# Altium PCB msp430.PcbDoc
Units mil, origin at the board's own origin, x right, y up, seen from the top; angles counter-clockwise.
Board outline 1082.68 x 1574.8 mil, 2 copper layers (Top Layer, Bottom Layer); 31 components, 24 nets, 154 pads, 79 vias.
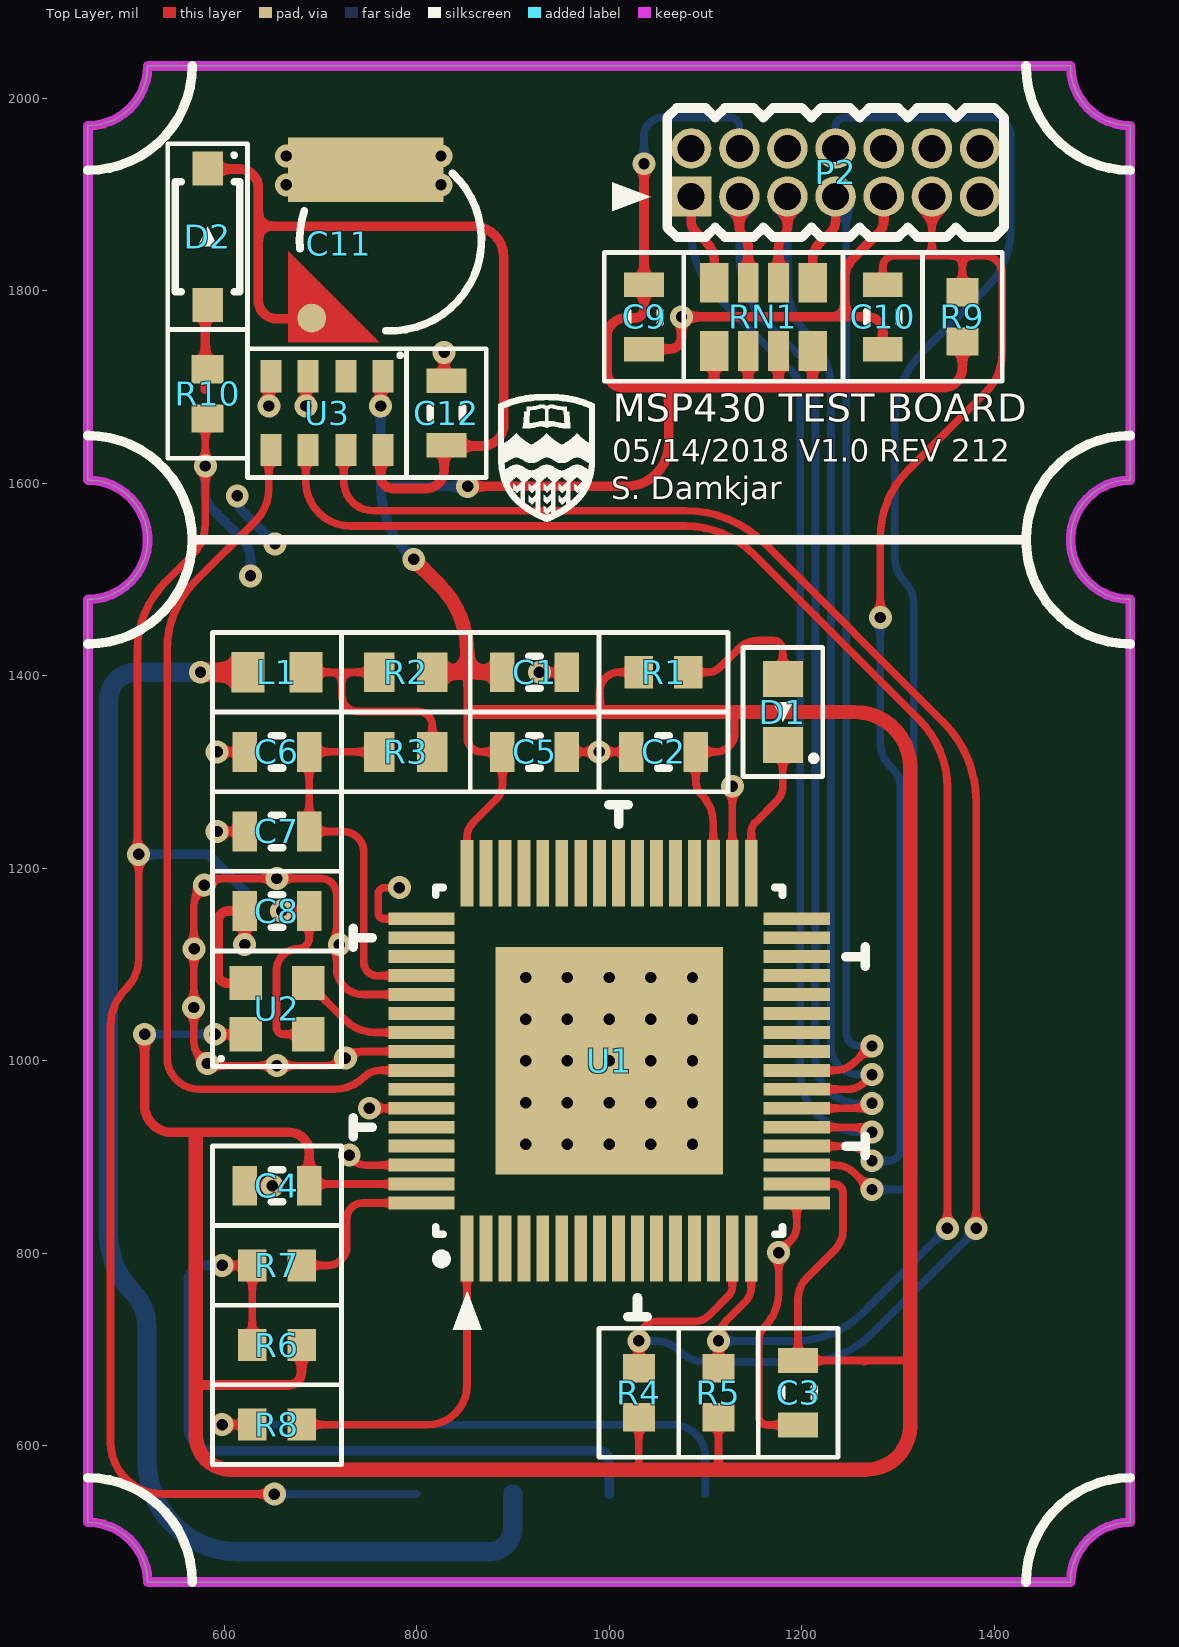
[diagram p0: Top Layer view]
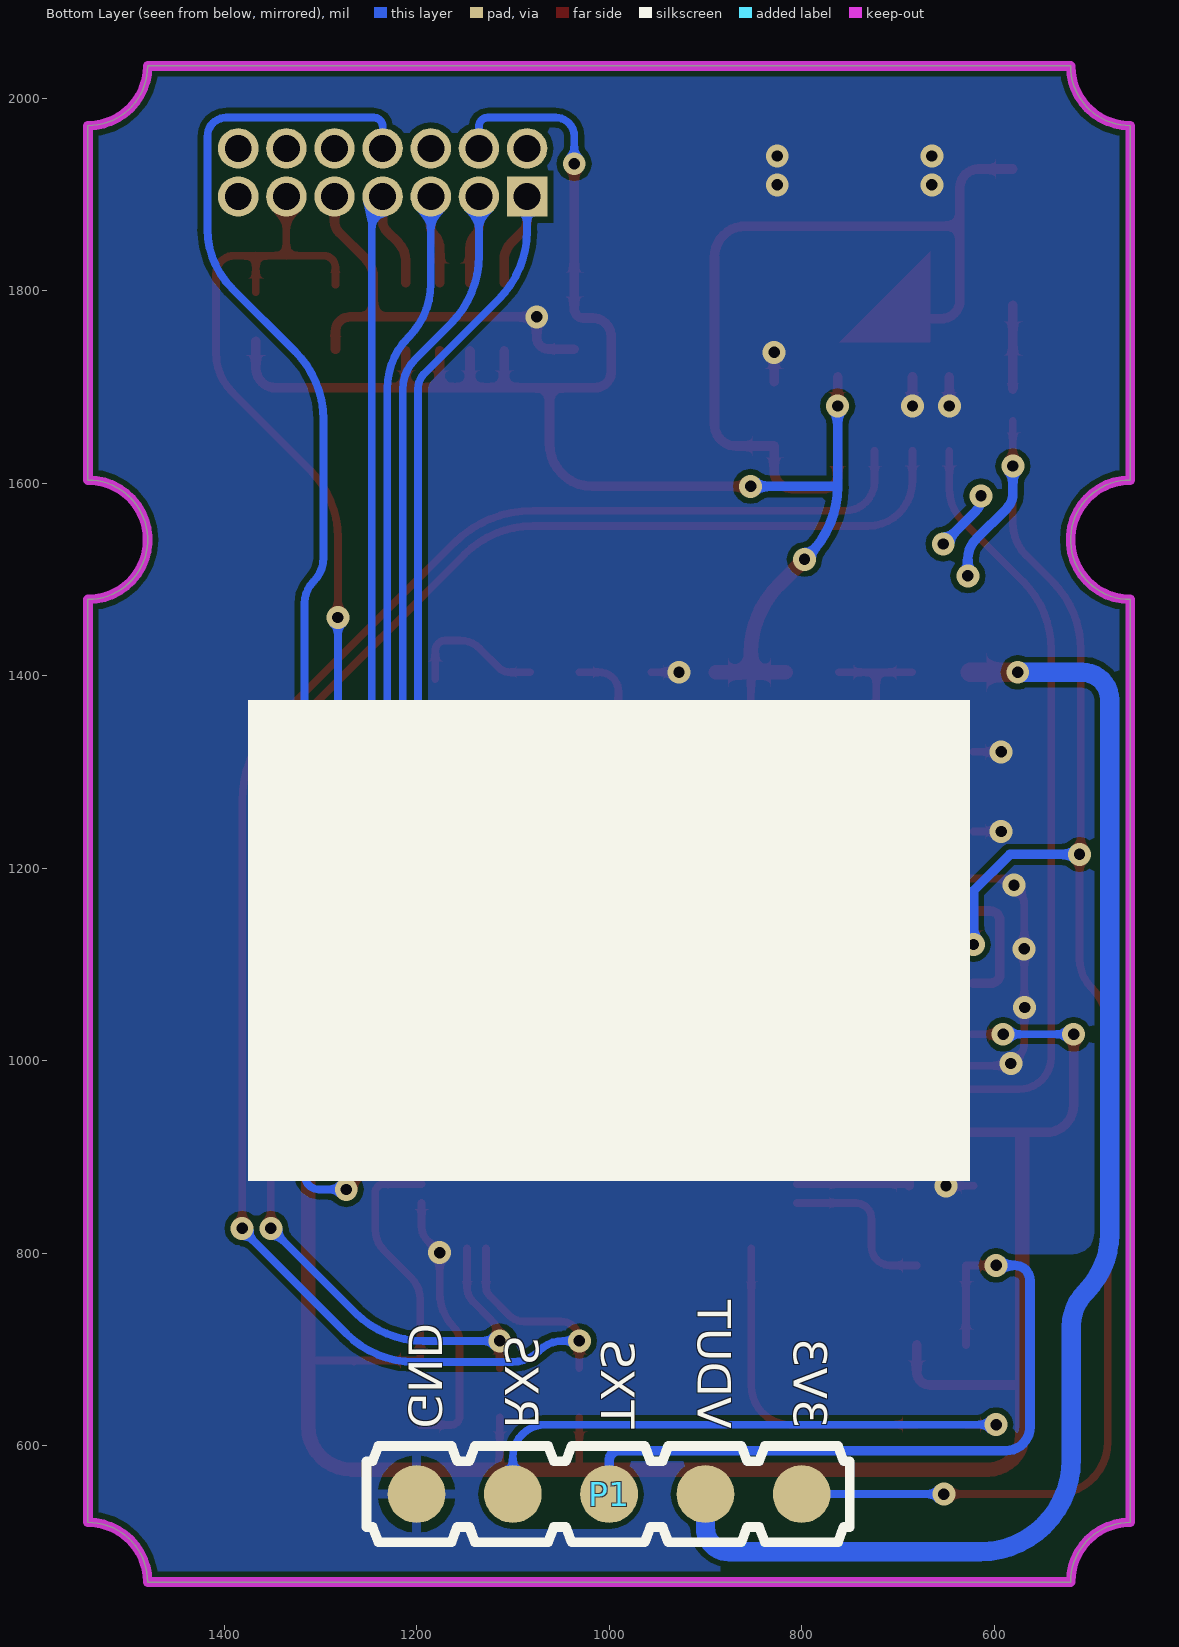
[diagram p1: Bottom Layer view, seen from below]

## Layer stack, top to bottom
Top Solder: solder mask 0.4, Solder Resist, Dk 3.5
Top Layer: signal copper 1.4
Dielectric 1: dielectric 12.6, FR-4, Dk 4.8
Bottom Layer: signal copper 1.4
Bottom Solder: solder mask 0.4, Solder Resist, Dk 3.5

## Board outline
458.66,520.67 458.66,1479.33 ccw(c458.66,1541.34) 458.66,1603.35 458.66,1971.46 ccw(c458.66,2033.46) 520.67,2033.46 1479.33,2033.46 ccw(c1541.34,2033.46) 1541.34,1971.46 1541.34,1603.35 ccw(c1541.34,1541.34) 1541.34,1479.33 1541.34,520.67 ccw(c1541.34,458.66) 1479.33,458.66 520.67,458.66 ccw(c458.66,458.66)

## Design rules (kind name [scope] priority, off if disabled: settings)
AcuteAngle [All] p1: minimum=6.00000000000000E+0001 checktracksonly=FALSE
BoardOutlineClearance [All] p1: gap=7.87 ignorepadtopadclearanceinfootprint=FALSE
Clearance [All] p1: gap=6 ignorepadtopadclearanceinfootprint=FALSE except(0: Arc-Hole Track-Hole SMDPad-Hole THPad-Hole Via-Hole Fill-Hole Poly-Hole Region-Hole Text-Hole)
Clearance ClearanceTop [OnLayer('Component Side')] p2 off: gap=4 ignorepadtopadclearanceinfootprint=FALSE except(0: Arc-Hole Track-Hole SMDPad-Hole THPad-Hole Via-Hole Fill-Hole Poly-Hole Region-Hole Text-Hole)
Clearance ClearanceTop_1 [OnLayer('Signal Layer 1')] p3 off: gap=4 ignorepadtopadclearanceinfootprint=FALSE except(0: Arc-Hole Track-Hole SMDPad-Hole THPad-Hole Via-Hole Fill-Hole Poly-Hole Region-Hole Text-Hole)
Clearance ClearanceTop_2 [OnLayer('Signal Layer 2')] p4 off: gap=4 ignorepadtopadclearanceinfootprint=FALSE except(0: Arc-Hole Track-Hole SMDPad-Hole THPad-Hole Via-Hole Fill-Hole Poly-Hole Region-Hole Text-Hole)
Clearance ClearanceBottom [OnLayer('Solder Side')] p5 off: gap=4 ignorepadtopadclearanceinfootprint=FALSE except(0: Arc-Hole Track-Hole SMDPad-Hole THPad-Hole Via-Hole Fill-Hole Poly-Hole Region-Hole Text-Hole)
Height HeightTop [OnLayer('Component Side')] p1: minheight=0 maxheight=1000 prefheight=157.48
Height HeightBottom [OnLayer('Solder Side')] p2: minheight=0 maxheight=157.48 prefheight=157.48
HoleSize [All] p1: absolutevalues=TRUE maxlimit=255.91 minlimit=7.87 maxpercent=80.000 minpercent=20.000
MinimumAnnularRing [All] p1: minimumring=4
MinimumSolderMaskSliver [All] p1: minsoldermaskwidth=3.94
PolygonConnect PolygonConnect_1 [IsVia] p1: connectstyle=Direct reliefconductorwidth=10 reliefentries=4 polygonreliefangle="90 Angle" airgapwidth=10
PolygonConnect [All] p2: connectstyle=Relief reliefconductorwidth=10 reliefentries=4 polygonreliefangle="90 Angle" airgapwidth=10
RoutingVias [All] p1: holewidth=8 width=20 viastyle="Through Hole" minholewidth=11.81 minwidth=23.81 maxholewidth=28 maxwidth=50
SMDEntry [All] p1: side=TRUE corner=FALSE anyangle=FALSE
SMDNeckDown [All] p1: percent=90.000
SMDToCorner [All] p1: distance=0
SMDToPlane [All] p1: distance=0
SilkToSilkClearance [All] p1: silktosilkclearance=6
SilkToSolderMaskClearance [IsPad] p1: minsilkscreentomaskgap=5.12 clearancetoexposedcopper=TRUE
SolderMaskExpansion [All] p1: expansion=0
UnConnectedPin [All] p1:
Width [All] p1: maxlimit=100 minlimit=6 preferedwidth=10 checkconnectedcopper=TRUE
25 further rules are at their usual default settings.

## Components (designator, comment, footprint, x,y, rotation, side; value= is the part's Value field where it differs from the comment)
C1 "Cap" TDK-CGA3E 922.63,1403.66 r180 top value=1µF
C2 "Cap" TDK-CGA3E 1056.49,1320.99 r0 top value=0.1µF
C3 "Cap" TDK-CGA3E 1196.26,655.24 r90 top value=0.1µF
C4 "Cap" TDK-CGA3E 654.91,870.2 r0 top value=0.1µF
C5 "Cap" TDK-CGA3E 922.63,1320.99 r180 top value=0.1µF
C6 "Cap" TDK-CGA3E 654.91,1320.99 r0 top value=1µF
C7 "Cap" TDK-CGA3E 654.91,1238.31 r0 top value=0.1µF
C8 "Cap" TDK-CGA3E 654.91,1155.63 r180 top value=10000pF
C9 "Cap" TDK-CGA3E 1036.24,1772.87 r90 top value=0.1µF
C10 "Cap" TDK-CGA3E 1284.27,1772.87 r270 top value=0.1µF
C11 "XH414HG" SKI-XH414HG-IV01E 772.93,1852.87 r180 top value=80mF
C12 "Cap" TDK-CGA3E 830.96,1672.87 r270 top value=0.1µF
D1 "LED" WL-150060XS75000 1180.5,1362.33 r270 top value=BLUE
D2 "1N4148W" DIOD-SOD123 582.93,1856.26 r90 top
L1 "Inductor" TDK-MPX1608 654.91,1403.66 r180 top value="1 kOhm @ 100MHz"
P1 "319-10-105-30-054000" 319-10-105-30-054000 800,550 r0 bottom
P2 "Header 7x2" SLN-GRPB072 1085.25,1897.87 r0 top
R1 "Res3" PANA-ERJ3EK 1056.49,1403.67 r180 top value=10k
R2 "Res3" VSH-0603MCT 788.77,1403.67 r0 top value=1
R3 "Res3" VSH-0603MCT 788.77,1320.99 r0 top value=1
R4 "Res3" PANA-ERJ3EK 1030.9,655.24 r270 top value=1k
R5 "Res3" PANA-ERJ3EK 1113.58,655.24 r270 top value=1k
R6 "Res3" PANA-ERJ3EK 654.91,704.85 r0 top value=1k
R7 "Res3" PANA-ERJ3EK 654.91,787.52 r180 top value=33
R8 "Res3" PANA-ERJ3EK 654.91,622.17 r180 top value=33
R9 "Res3" PANA-ERJ3EK 1366.95,1772.87 r90 top value=10k
R10 "Res3" PANA-ERJ3EK 582.93,1692.87 r270 top value=49.9
RN1 "Res4 Pack1" PANA-EXB1206 1160.26,1772.87 r270 top value=1k
U1 "MSP430FR5989" TI-RGC 1000,1000 r90 top
U2 "ASDMB" ABR-ASDMB 654.91,1054.22 r90 top value=16MHz
U3 "RTCMK" ABR-RTCMK 706.94,1672.87 r270 top value=32.768kHz

## Footprints (in the part's own frame and the unit in brackets; to place one, negate y for a bottom-side part, rotate by r counter-clockwise, add the part's x,y. Pads: shape width x height; smd on the part's side, far side on the other; paste and mask are expansions set on the pad)
319-10-105-30-054000 [mil]
  round 60 smd: 1(0,0) 2(100,0) 3(200,0) 4(300,0) 5(400,0)
  silkscreen extent -50,-50 452,50, body extent -50,-50 450,50, height 87
ABR-ASDMB [mm] "DFN, 4-Leads, Body 2.00x2.50mm, Pitch 1.65mm, IPC Low Density"
  rect 0.9x0.85 smd: 1(-0.675,0.825) 2(-0.675,-0.825) 3(0.675,-0.825) 4(0.675,0.825)
  silkscreen extent -1.52,-1.7 1.53,1.7, body extent -1,-1.25 1,1.25, height 0.86
ABR-RTCMK [mm]
  rect 0.85x0.55 smd: 1(-0.975,1.475) 2(-0.975,0.5) 3(-0.975,-0.5) 4(-0.975,-1.475) 5(0.975,-1.475) 6(0.975,-0.5) 7(0.975,0.5) 8(0.975,1.475)
  silkscreen extent -1.7,-2.1 1.7,2.1, body extent -1.25,-1.6 1.25,1.6, height 1
DIOD-SOD123 [mm] "SODFL, 2-Leads, Body 1.55x3.70mm, IPC Low Density"
  rect 0.9x0.8 smd: 1(-1.8,0) 2(1.8,0)
  silkscreen extent -2.45,-1.05 2.45,1.05, body extent -1.85,-0.85 1.85,0.85, height 1.45
PANA-ERJ3EK [mm] "Chip Resistor, 2-Leads, Body 1.60x0.85mm, IPC High Density"
  rect 0.75x0.85 smd: 1(-0.65,0) 2(0.65,0)
  silkscreen extent -1.7,-1.05 1.7,1.05, body extent -0.88,-0.48 0.87,0.48, height 0.55
PANA-EXB1206 [mm] "Chip Array, ConvexS, 8-Leads, Pitch 0.80mm,  Body 3.20x1.60mm,  IPC Low Density"
  rect 1.05x0.75 smd: 1(-0.9,1.3) 4(-0.9,-1.3) 5(0.9,-1.3) 8(0.9,1.3)
  rect 1.05x0.55 smd: 2(-0.9,0.4) 3(-0.9,-0.4) 6(0.9,-0.4) 7(0.9,0.4)
  silkscreen extent -1.7,-2.1 1.7,2.1, body extent -0.92,-1.7 0.92,1.7, height 0.6
SKI-XH414HG-IV01E [mm]
  round 0.762 smd: 1(2.078,2.065)
  rect 4.1x1.7 smd: 2(0.65,-1.85)
  Top Layer region: 2.7,0.3 0.3,2.7 2.7,2.7
  silkscreen extent -2.4,-1.75 2.4,2.4, body extent -2.4,-2.4 2.4,2.4, height 1.62
SLN-GRPB072 [mil]
  rect 42x42 hole 28: 1(0,0)
  round 42 hole 28: 2(0,50) 3(50,0) 4(50,50) 5(100,0) 6(100,50) 7(150,0) 8(150,50) 9(200,0) 10(200,50) 11(250,0) 12(250,50) 13(300,0) 14(300,50)
  silkscreen extent -25,-42 325,92, body extent -25,-42 325,92, height 130
TDK-CGA3E [mm] "Chip Capacitor, 2-Leads, Body 1.60x0.80mm, IPC Low Density"
  rect 0.65x1.05 smd: 1(-0.85,0) 2(0.85,0)
  silkscreen extent -1.7,-1.05 1.7,1.05, body extent -0.85,-0.45 0.85,0.45, height 0.8
TDK-MPX1608 [mm] "Chip Inductor, 2-Leads, Body 1.60x0.80mm, IPC Low Density"
  rect 0.87x1.08 smd: 1(-0.765,0) 2(0.765,0)
  silkscreen extent -1.7,-1.05 1.7,1.05, body extent -0.87,-0.48 0.87,0.47, height 0.75
TI-RGC [mm] "PQFN, 64-Leads, Body 9.00x9.00mm, Pitch 0.50mm, Thermal Pad 6.00x6.00mm, IPC Low Density"
  rect 1.75x0.34 smd: 1(-4.95,3.75) 2(-4.95,3.25) 3(-4.95,2.75) 4(-4.95,2.25) 5(-4.95,1.75) 6(-4.95,1.25) 7(-4.95,0.75) 8(-4.95,0.25) 9(-4.95,-0.25) 10(-4.95,-0.75) 11(-4.95,-1.25) 12(-4.95,-1.75) 13(-4.95,-2.25) 14(-4.95,-2.75) 15(-4.95,-3.25) 16(-4.95,-3.75) 33(4.95,-3.75) 34(4.95,-3.25) 35(4.95,-2.75) 36(4.95,-2.25) 37(4.95,-1.75) 38(4.95,-1.25) 39(4.95,-0.75) 40(4.95,-0.25) 41(4.95,0.25) 42(4.95,0.75) 43(4.95,1.25) 44(4.95,1.75) 45(4.95,2.25) 46(4.95,2.75) 47(4.95,3.25) 48(4.95,3.75)
  rect 0.34x1.75 smd: 17(-3.75,-4.95) 18(-3.25,-4.95) 19(-2.75,-4.95) 20(-2.25,-4.95) 21(-1.75,-4.95) 22(-1.25,-4.95) 23(-0.75,-4.95) 24(-0.25,-4.95) 25(0.25,-4.95) 26(0.75,-4.95) 27(1.25,-4.95) 28(1.75,-4.95) 29(2.25,-4.95) 30(2.75,-4.95) 31(3.25,-4.95) 32(3.75,-4.95) 49(3.75,4.95) 50(3.25,4.95) 51(2.75,4.95) 52(2.25,4.95) 53(1.75,4.95) 54(1.25,4.95) 55(0.75,4.95) 56(0.25,4.95) 57(-0.25,4.95) 58(-0.75,4.95) 59(-1.25,4.95) 60(-1.75,4.95) 61(-2.25,4.95) 62(-2.75,4.95) 63(-3.25,4.95) 64(-3.75,4.95)
  rect 6x6 smd: 65(0,0)
  silkscreen extent -7.1,-6.76 6.76,6.76, body extent -4.57,-4.57 4.57,4.57, height 1
VSH-0603MCT [mm] "Chip Resistor, 2-Leads, Body 1.55x0.85mm, IPC Low Density"
  rect 0.8x1.05 smd: 1(-0.7,0) 2(0.7,0)
  silkscreen extent -1.7,-1.05 1.7,1.05, body extent -0.8,-0.48 0.8,0.48, height 0.55
WL-150060XS75000 [mm] "Chip Diode, 2-Leads, Body 1.60x0.80mm, IPC Low Density"
  rect 0.95x1.05 smd: 1(-0.875,0) 2(0.875,0)
  silkscreen extent -1.7,-1.05 1.7,1.05, body extent -0.8,-0.4 0.8,0.4, height 0.7

## Part data
C1 C6: library part PC-TDK-02603, "CAP CER 1UF 25V X7R 0603", Manufacturer Part Number=CGA3E1X7R1E105K080AC, Supplier Part Number 1=445-6931-1-ND, Temperature Coefficient=X7R, Tolerance=±10%, Voltage - Rated=25V, Applications=Automotive, Index=2603, LatestRevisionDate=3/16/2016, LatestRevisionNote=..., PackageDescription="Radial Cap, Thru-Hole; 2 Leads; 0.3 in Pin Spacing", PackageReference="0603 (1608 Metric)", Part Number=PC-TDK-02603, Published=3/16/2016, Publisher=AlbertaSat, Supplier 1=Digi-key, Supplier Link=http://www.digikey.ca/product-search/en?keywords=445-6931-1-ND
C2 C3 C4 C5 C7 C9 C10 C12: library part PC-TDK-02272, "CAP CER 0.1UF 50V X8R 0603", Manufacturer Part Number=CGA3E3X8R1H104K080AB, Supplier Part Number 1=445-12606-1-ND, Temperature Coefficient=X8R, Tolerance=±10%, Voltage - Rated=50V, Applications=Automotive, Index=2272, LatestRevisionDate=3/16/2016, LatestRevisionNote=..., PackageDescription="Radial Cap, Thru-Hole; 2 Leads; 0.3 in Pin Spacing", PackageReference="0603 (1608 Metric)", Part Number=PC-TDK-02272, Published=3/16/2016, Publisher=AlbertaSat, Supplier 1=Digi-key, Supplier Link=http://www.digikey.ca/product-search/en?keywords=445-12606-1-ND
C8: library part PC-TDK-01883, "CAP CER 10000PF 100V C0G 0603", Manufacturer Part Number=CGA3E1C0G2A103J080AC, Supplier Part Number 1=445-172688-1-ND, Temperature Coefficient=NP0, Tolerance=±5%, Voltage - Rated=100V, Applications=Automotive, Index=1883, LatestRevisionDate=3/16/2016, LatestRevisionNote=..., PackageDescription="Radial Cap, Thru-Hole; 2 Leads; 0.3 in Pin Spacing", PackageReference="0603 (1608 Metric)", Part Number=PC-TDK-01883, Published=3/16/2016, Publisher=AlbertaSat, Supplier 1=Digi-key, Supplier Link=http://www.digikey.ca/product-search/en?keywords=445-172688-1-ND
C11: library part PC-SKI-00001, "CAP 80MF 3.3V SURFACE MOUNT", Manufacturer Part Number=XH414HG-IV01E, Supplier Part Number 1=728-1050-1-ND, Voltage - Rated=3.3V, Index=1, LatestRevisionDate=2018-04-25, LatestRevisionNote=..., PackageDescription="Polarized Capacitor (Radial); 2 Leads", PackageReference="0.189\" Dia (4.80mm)", Part Number=PC-SKI-00001, Published=2018-04-25, Publisher=AlbertaSat, Supplier 1=Digi-key, Supplier 2=Mouser, Supplier Link=#https://www.digikey.ca/product-detail/en/seiko-instruments/XH414HG-IV01E/728-1050-1-ND/1889211#, Supplier Part Number 2=628-XH414HG-IV01E
D1: library part 4, "LED BLUE CLEAR 0603 SMD", Manufacturer Part Number=150060BS75000, Supplier Part Number 1=732-4966-1-ND, Brightness=145mcd, LatestRevisionDate=08-Jul-2005, LatestRevisionNote="Mech Layer 1 removed.", PackageDescription="LED; 2 Leads", PackageReference=WL-150060XS75000, Part Number=4, Published=8-Jun-2000, Publisher="Altium Limited", Supplier 1=Digi-Key, Supplier Link=http://www.digikey.ca/product-search/en?keywords=732-4966-1-ND
D2: library part 26, "DIODE GEN PURP 100V 300MA SOD123", Current - Peak Pulse=300mA, Manufacturer Part Number=1N4148W-7-F, Supplier Part Number 1=1N4148W-FDICT-ND, Voltage - DC Reverse="1.25V @ 150mA", Voltage - Reverse Standoff (Typ)=100V, Code_JEDEC=DO-214-AB, LatestRevisionDate=17-Jul-2002, LatestRevisionNote="Re-released for DXP Platform.", PackageDescription="DO-214-AB/SMC; 2 C-Bend Leads; Body 7.9 x 5.9 mm, inc. leads (LxW)", PackageReference=DIOD-SOD123, PackageVersion=Sep-1996, Part Number=26, Published=8-Jun-2000, Publisher="Altium Limited", Supplier 1=Digi-Key, Supplier Link=#https://www.digikey.ca/product-detail/en/diodes-incorporated/1N4148W-7-F/1N4148W-FDICT-ND/815280#
L1: library part PL-TDK-02954, "FERRITE BEAD 1 KOHM 0603 1LN", Current - Rated=800mA, Manufacturer Part Number=MPZ1608S102ATD25, Supplier Part Number 1=445-172890-1-ND, Applications=Automotive, Code_IEC=1608, Code_JEITA=0603, Index=2954, LatestRevisionDate=7/8/2017, LatestRevisionNote=..., PackageDescription="Chip Inductor, 2-Leads, Body 1.60x0.80mm, IPC Low Density", PackageReference="0603 (1608 Metric)", Part Number=PL-TDK-02954, Published=7/8/2017, Publisher=AlbertaSat, Supplier 1=Digi-key, Supplier 2=Mouser, Supplier Link=#https://www.digikey.ca/product-detail/en/tdk-corporation/MPZ1608S102ATD25/445-172890-1-ND/5040521#, Supplier Part Number 2=810-MPZ1608S102ATD25
P1: library part PP-MMM-00002, "LOW PROFILE SLC TARGET CONNECTOR", Supplier Part Number 1=ED10781-ND, Index=2, LatestRevisionDate=2018-05-10, LatestRevisionNote=..., Manufacturer Part Number=319-10-105-30-054000, Part Number=PP-MMM-00002, Published=2018-05-10, Publisher=AlbertaSat, Supplier 1=Digi-key, Supplier 2=Mouser, Supplier Link=#https://www.digikey.ca/product-detail/en/mill-max-manufacturing-corp/319-10-105-30-054000/ED10781-ND/6243896#, Supplier Part Number 2=575-3191010530054000
P2: library part PP-SLN-00019, "CONN HEADER .050\"\" 14PS DL PCB AU", Manufacturer Part Number=GRPB072VWVN-RC, Supplier Part Number 1=S9015E-07-ND, Index=19, LatestRevisionDate=2016-03-16, LatestRevisionNote=..., Number of Positions=14, Number of Rows=2, PackageDescription="CONN HEADER .050\"\" 14PS DL PCB AU", PackageReference=SLN-GRPB072, Part Number=PP-SLN-00019, Pitch="0.050\" (1.27mm)", Published=2016-03-16, Publisher=AlbertaSat, Supplier 1=Digi-key, Supplier Link=http://www.digikey.ca/product-search/en?keywords=S9015E-07-ND
R1 R9: library part 17203, "RES SMD 10K OHM 1% 1/10W 0603", Manufacturer Part Number=ERJ-3EKF1002V, Power="0.1W, 1/10W", Supplier Part Number 1=P10.0KHCT-ND, Temperature Coefficient=±100ppm/°C, Tolerance=±1%, LatestRevisionDate=29-May-2009, LatestRevisionNote="IPC-7351 Footprint Added.", PackageDescription="Chip Resistor, 2-Leads, Body 1.60x0.80mm, IPC Low Density", PackageReference="0603 (1608 Metric)", Part Number=17203, Published=8-Jun-2000, Publisher="Altium Limited", Supplier 1=Digi-Key, Supplier Link=http://www.digikey.ca/product-search/en?keywords=P10.0KHCT-ND
R2 R3: library part PR-VSH-00048, "RES SMD 1 OHM 1% 1/8W 0603", Manufacturer Part Number=MCT06030C1008FP500, Power - Rated=1/8W, Supplier Part Number 1=MCT0603-1.00-CFCT-ND, Temperature Coefficient=±50ppm/°C, Tolerance=±1%, Applications="General Purpose", Index=4, LatestRevisionDate=3/14/2016, LatestRevisionNote=..., PackageDescription="Chip Resistor, 2-Leads, Body 1.55x0.85mm, IPC Low Density", PackageReference="0603 (1608 Metric)", Part Number=PR-VSH-00048, Published=3/14/2016, Publisher=AlbertaSat, Supplier 1=Digi-key, Supplier Link=http://www.digikey.ca/product-search/en?keywords=MCT0603-1.00-CFCT-ND
R4 R5 R6: library part 15398, "RES SMD 1K OHM 1% 1/10W 0603", Manufacturer Part Number=ERJ-3EKF1001V, Power="0.1W, 1/10W", Supplier Part Number 1=P1.00KHCT-ND, Temperature Coefficient=±100ppm/°C, Tolerance=±1%, LatestRevisionDate=29-May-2009, LatestRevisionNote="IPC-7351 Footprint Added.", PackageDescription="Chip Resistor, 2-Leads, Body 1.60x0.80mm, IPC Low Density", PackageReference="0603 (1608 Metric)", Part Number=15398, Published=8-Jun-2000, Publisher="Altium Limited", Supplier 1=Digi-Key, Supplier Link=http://www.digikey.ca/product-search/en?keywords=P1.00KHCT-ND
R7 R8: library part 13588, "RES SMD 33 OHM 1% 1/10W 0603", Manufacturer Part Number=ERJ-3EKF33R0V, Power="0.1W, 1/10W", Supplier Part Number 1=P33.0HCT-ND, Temperature Coefficient=±100ppm/°C, Tolerance=±1%, LatestRevisionDate=29-May-2009, LatestRevisionNote="IPC-7351 Footprint Added.", PackageDescription="Chip Resistor, 2-Leads, Body 1.60x0.80mm, IPC Low Density", PackageReference="0603 (1608 Metric)", Part Number=13588, Published=8-Jun-2000, Publisher="Altium Limited", Supplier 1=Digi-Key, Supplier Link=http://www.digikey.ca/product-search/en?keywords=P33.0HCT-ND
R10: library part 13734, "RES SMD 49.9 OHM 1% 1/10W 0603", Manufacturer Part Number=ERJ-3EKF49R9V, Power="0.1W, 1/10W", Supplier Part Number 1=P49.9HCT-ND, Temperature Coefficient=±100ppm/°C, Tolerance=±1%, LatestRevisionDate=29-May-2009, LatestRevisionNote="IPC-7351 Footprint Added.", PackageDescription="Chip Resistor, 2-Leads, Body 1.60x0.80mm, IPC Low Density", PackageReference="0603 (1608 Metric)", Part Number=13734, Published=8-Jun-2000, Publisher="Altium Limited", Supplier 1=Digi-Key, Supplier Link=http://www.digikey.ca/product-search/en?keywords=P49.9HCT-ND
RN1: library part 19830, "RES ARRAY 4 RES 1K OHM 1206", Manufacturer Part Number=EXB-38V102JV, Power=62.5mW, Supplier Part Number 1=Y9102CT-ND, Temperature Coefficient=±200ppm/°C, Tolerance=±5%, Code_JEDEC=MS-012-AC, PackageDescription="Chip Array, ConvexS, 8-Leads, Pitch 0.80mm,  Body 3.20x1.60mm,  IPC Low Density", PackageReference="1206 (3216 Metric), Convex, Long Side Terminals", Part Number=19830, Sim Note="Enter the Resistance value into parameter field.", Supplier 1=Digi-Key, Supplier Link=http://www.digikey.ca/product-search/en?keywords=Y9102CT-ND
U1: library part 48, "IC MCU 16BIT 128KB FRAM 64VQFN", Manufacturer Part Number=M430FR5989SRGCREP, Operating Temperature="-40°C ~ 105°C (TA)", Supplier Part Number 1=M430FR5989SRGCREP-ND, Core Processor=CPUXV2, Core Size=16-Bit, PackageReference=TI-64QFN, Part Number=48, Program Memory Size="128KB (128K x 8)", RAM Size="2K x 8", Speed=16MHz, Supplier 1=Digi-Key, Supplier 2="Texas Instruments", Supplier Link=#https://www.digikey.ca/products/en?keywords=M430FR5989SRGCREP#, Supplier Part Number 2=M430FR5989SRGCREP
U2: library part PU-ABR-00014, "OSC MEMS 16.000MHZ CMOS SMD", Manufacturer Part Number=ASDMB-16.000MHZ-XY-T, Supplier Part Number 1=535-11457-1-ND, Tolerance=±10ppm, Index=14, LatestRevisionDate=2017-10-24, LatestRevisionNote=..., PackageDescription="DFN, 4-Leads, Body 2.00x2.50mm, Pitch 1.65mm, IPC Low Density", PackageReference="4-SMD, No Lead", Part Number=PU-ABR-00014, Published=2017-10-24, Publisher=AlbertaSat, Supplier 1=Digi-key, Supplier 2=Mouser, Supplier Link=http://www.digikey.ca/product-search/en?keywords=535-11457-1-ND, Supplier Part Number 2=815-ASDMB-16-XY-T
U3: library part PU-ABR-00037, "IC RTC CLK/CALENDAR I2C 8-SMT", Manufacturer Part Number=AB-RTCMK-32.768KHZ-T3, Supplier Part Number 1=535-11916-1-ND, Index=37, LatestRevisionDate=4/23/2018, LatestRevisionNote=..., PackageDescription="8-SMD Module", PackageReference="8-SMD Module", Part Number=PU-ABR-00037, Published=4/23/2018, Publisher=AlbertaSat, Supplier 1=Digi-key, Supplier 2=Mouser, Supplier Link=https://www.digikey.ca/product-detail/en/abracon-llc/AB-RTCMK-32.768KHZ-T3/535-11916-1-ND/3601050, Supplier Part Number 2=815-AB-RTCMK-32.7KT3

## Via types
v1: diameter 23.81, hole 11.81, Top Layer to Bottom Layer, tented both sides, 54 vias
v2: diameter 23.9, hole 11.85, Top Layer to Bottom Layer, tented both sides, 25 vias

## Nets (pads, with @x,y where several pads share a name; then routed paths per layer and width w, separated by ;. In a path a pad name is that pad's centre, name@x,y a point inside that pad or via, vN(x,y) a via of type N, cw(c..) or ccw(c..) an arc to the next point about the centre after c; other vN are vias at no path point)
3V3CD: C8.2 P1.1 R10.2 U2.4 | length 1911.3
  Top Layer w8: R10.2@580.59,1664.94 v1(580.59,1617.94) 580.59,1558.42 cw(c533.42,1558.42) 566.78,1525.07 539.29,1497.59 ccw(c610,1426.88) 510,1426.88 510,1215 ccw(c511.32,1216.32) v1(511.32,1214.45) 511.32,1106.3 cw(c467.63,1106.3) 498.53,1075.41 ccw(c538.39,1035.54) 482.01,1035.54 482.01,604.44 ccw(c536.46,604.44) 536.46,550 v1(652.25,550)
  Top Layer w10: v1(621.45,1120.87) C8.2 604.1,1155.63 ccw(c604.1,1145.57) 594.03,1145.57 594.03,1090 ccw(c603.24,1090) 603.24,1080.79 U2.4
  Bottom Layer w8: v1(652.25,550) P1.1
  Bottom Layer w10: v1(511.32,1214.45) 583.74,1214.45 621.45,1176.74 v1(621.45,1120.87) ; v1(580.59,1617.94) 580.59,1589.22 ccw(c602.18,1589.22) 586.91,1573.95 618.75,1542.11 cw(c597.85,1521.21) 627.41,1521.21 v1(627.41,1503.84)
#RESET3: C10.1 P2.11 R9.2 U1.20 | length 1341.2
  Top Layer w8: U1.20 1247.92,911.42 cw(c1247.92,887.34) 1264.95,904.36 v1(1273.09,896.23) v1@1271.92,896.23 ; v1(1281.72,1460.57) 1281.72,1543.41 cw(c1381.72,1543.41) 1311,1614.13 1391.33,1694.45 ccw(c1350.02,1735.75) 1408.44,1735.75 1408.44,1817.53 ccw(c1389.55,1817.53) 1389.55,1836.41 1366.95,1836.41 ; C10.1 1284.27,1824.1 cw(c1296.58,1824.1) 1296.58,1836.41 1335.25,1836.41 ; P2.11 1335.25,1836.41 ; R9.2 1366.95,1836.41 ; 1335.25,1836.41 1366.95,1836.41
  Bottom Layer w8: v1(1273.09,896.23) 1290.7,896.23 ccw(c1290.7,907.94) 1302.41,907.94 1302.41,1286.2 ccw(c1280.57,1286.2) 1296.01,1301.64 1292.06,1305.59 cw(c1317.04,1330.57) 1281.72,1330.57 v1(1281.72,1460.57)
BLINKY3: D1.2 U1.33 | length 145
  Top Layer w8: U1.33 1147.64,1237.93 cw(c1161.11,1237.93) 1151.58,1247.46 1173.61,1269.48 ccw(c1156.95,1286.13) 1180.5,1286.13 D1.2
GNDC: C1.1 C2.1 C3.1 C4.1 C5.1 C6.1 C7.1 C8.1 C9.1 C10.2 C11.2 C12.1 P1.5 P2.9 U1.17 U1.34 U1.49 U1.53 U1.56 U1.59 U1.62 U1.65 U2.2 U3.3 U3.4 | length 2269.1
  Top Layer w8: v1(592.81,1238.31) C7.1 ; v1(592.81,1320.99) C6.1 ; C4.1 v1(650.08,870.2) ; v1(659.74,1155.63) C8.1 688.38,1127.62 cw(c677.25,1127.62) 677.25,1116.5 ccw(c677.25,1093.7) 654.45,1093.7 654.45,1035.07 ccw(c661.88,1035.07) 661.88,1027.64 U2.2 ; v1(730.07,902.12) ccw(c735.63,902.12) 731.7,898.2 ccw(c747.31,913.81) 747.31,891.73 U1.62 ; v1(750.96,950.79) U1.59 ; v1(782.1,1179.89) 766.91,1179.89 ccw(c766.91,1173.14) 760.16,1173.14 760.16,1153.38 ccw(c765.9,1153.38) 765.9,1147.64 U1.49 ; U1.56 743.15,1009.84 ccw(c743.15,985.71) v1(726.08,1002.77) cw(c707.3,1021.56) 707.3,994.99 v1(654.91,994.99) 593.81,994.99 cw(c593.81,1020.17) 568.63,1020.17 568.63,1160.68 cw(c597.47,1160.68) 597.47,1189.52 v1(654.91,1189.52) 700.45,1189.52 cw(c700.45,1173.04) 716.93,1173.04 716.93,1096.54 ccw(c744.57,1096.54) 744.57,1068.9 U1.53 ; v1(927.46,1403.66) C1.1 ; C5.1 v1(989.56,1320.99) C2.1 ; U1.34 v1(1127.95,1285.3) ; U1.17 1194.88,828.44 cw(c1173.39,828.44) 1188.59,813.24 v1(1176.09,800.74) 1176.09,759.47 cw(c1124.27,759.47) 1160.91,722.83 ccw(c1174.34,709.39) 1155.34,709.39 1155.34,630.75 ccw(c1164.32,630.75) 1164.32,621.77 C3.1
  Top Layer w10: v1(646.54,1680.24) U3.4@646.54,1710.55 ; v1(684.92,1680.24) U3.3@684.92,1710.55 ; C12.1@828.62,1705.63 v1(828.62,1735.94) ; C9.1 1063.09,1739.41 ccw(c1063.09,1751.53) 1075.22,1751.53 v1(1075.22,1772.8) 1244.93,1772.8 ; 1252.72,1832.74 ccw(c1271.57,1813.91) 1244.93,1813.91 1244.93,1772.8 ; 1252.73,1832.75 1280.34,1860.36 ccw(c1268.47,1872.22) 1285.25,1872.22 P2.9 ; C10.2 1284.27,1757.85 ccw(c1269.32,1757.85) 1269.32,1772.8 1244.93,1772.8
  other v1: 582.69,997.26 568.37,1055.45 568.97,1116.33 719.67,1120.8 579.41,1182.57 664.69,1910 825.32,1910 664.69,1940 825.32,1940
  other v2: 913.39,913.39 956.69,913.39 1000,913.39 1043.31,913.39 1086.61,913.39 913.39,956.69 956.69,956.69 1000,956.69 1043.31,956.69 1086.61,956.69 913.39,1000 956.69,1000 1000,1000 1043.31,1000 1086.61,1000 913.39,1043.31 956.69,1043.31 1000,1043.31 1043.31,1043.31 1086.61,1043.31 913.39,1086.61 956.69,1086.61 1000,1086.61 1043.31,1086.61 1086.61,1086.61
HFXIN3: U1.55 U2.3 | length 137
  Top Layer w8: U2.3 725.44,1042.74 ccw(c757.34,1074.64) 757.34,1029.53 U1.55
LFXIN3: U1.57 U3.5 | length 955.9
  Top Layer w8: U3.5@646.54,1633.78 646.54,1594.15 cw(c599.22,1594.15) 632.68,1560.69 570.13,1498.15 ccw(c640.84,1427.44) 540.84,1427.44 540.84,1003.6 ccw(c573.82,1003.6) 573.82,970.62 714.71,970.62 ccw(c714.71,1014.84) 745.98,983.57 cw(c761.88,967.67) 761.88,990.16 U1.57
NetC11_1: C11.1 C12.2 D2.2 U3.8 | length 905
  Top Layer w10: D2.2@580.59,1926.42 616.34,1926.42 cw(c616.34,1907.17) 635.59,1907.17 635.59,1867.17 ; C11.1@688.78,1770.87 654.83,1770.87 cw(c654.83,1790.1) 635.59,1790.1 635.59,1867.17 ; U3.8@762.68,1633.78 762.68,1607.24 ccw(c775.29,1607.24) 775.29,1594.63 810.11,1594.63 ccw(c810.11,1613.14) 828.62,1613.14 828.62,1638.7 868.24,1638.7 ccw(c868.24,1661.05) 890.59,1661.05 890.59,1834.92 ccw(c858.34,1834.92) 858.34,1867.17 635.59,1867.17
NetD1_1: D1.1 R1.1 | length 145.6
  Top Layer w8: R1.1 1102.81,1403.66 ccw(c1102.81,1420.63) 1114.79,1408.63 1134.45,1428.28 cw(c1154.71,1408.01) 1154.71,1436.67 1170.15,1436.67 cw(c1170.15,1426.31) 1180.5,1426.31 D1.1
NetD2_1: D2.1 R10.1 | length 86.9
  Top Layer w10: 580.59,1697.76 D2.1@580.59,1784.68
NetL1_1: L1.1 R2.1 R3.2 | length 239.3
  Top Layer w8: L1.1 722.39,1403.66 ; R2.1 722.39,1403.66 ; R3.2 816.33,1348.12 ccw(c801.46,1348.12) 801.46,1362.98 738.89,1362.98 cw(c738.89,1379.48) 722.39,1379.48 722.39,1403.66
NetP1_3: P1.3 R6.1 R7.2 | length 802
  Top Layer w8: v1(598.05,787.52) R7.2 R6.1
  Bottom Layer w10: v1(598.05,787.52) 578.48,787.52 ccw(c578.48,771.86) 562.81,771.86 562.81,619.96 ccw(c587.67,619.96) 587.67,595.1 989.61,595.1 cw(c989.61,584.71) 1000,584.71 P1.3
NetP1_4: P1.4 R8.2 | length 590.8
  Top Layer w8: v1(598.05,622.17) R8.2
  Bottom Layer w8: v1(598.05,622.17) 1066.08,622.17 cw(c1066.08,588.25) 1100,588.25 P1.4
NetR7_1: R7.1 U1.64 | length 174
  Top Layer w8: R7.1 707.85,787.52 ccw(c707.85,807.17) 727.5,807.17 727.5,835.96 cw(c743.9,835.96) 743.9,852.36 U1.64
NetR8_1: R8.1 U1.1 | length 337.4
  Top Layer w8: R8.1 811.78,622.17 ccw(c811.78,662.75) 852.36,662.75 U1.1
SCL3: R5.1 U1.16 U3.6 | length 1728.7
  Top Layer w8: U3.6@684.92,1633.78 684.92,1602.09 ccw(c731.45,1602.09) 731.45,1555.56 1079.44,1555.56 cw(c1079.44,1455.56) 1150.15,1526.28 1322.12,1354.31 cw(c1251.41,1283.6) 1351.41,1283.6 v1(1351.41,826.03) ; R5.1 v1(1113.58,709.09) cw(c1144.61,709.09) 1122.67,731.03 1141.29,749.65 ccw(c1125.96,764.98) 1147.64,764.98 U1.16
  Bottom Layer w8: v1(1113.58,709.09) 1193.05,709.09 ccw(c1193.05,809.09) 1263.76,738.38 v1(1351.41,826.03)
SDA3: R4.1 U1.15 U3.7 | length 1896.8
  Top Layer w8: U3.7@724.29,1633.78 724.29,1602.09 ccw(c754.82,1602.09) 754.82,1571.56 1079.44,1571.56 cw(c1079.44,1455.56) 1161.47,1537.59 1347.25,1351.81 cw(c1265.22,1269.78) 1381.22,1269.78 v1(1381.22,826.03) ; R4.1 v1(1030.9,709.09) 1030.9,710.2 cw(c1049.98,710.2) 1049.98,729.28 1088.81,729.28 ccw(c1088.81,750) 1103.47,735.35 1123.97,755.85 ccw(c1114.37,765.46) 1127.95,765.46 U1.15
  Bottom Layer w8: v1(1030.9,709.09) 1047.84,709.09 cw(c1047.84,673.66) 1072.89,698.71 ccw(c1100.72,726.54) 1100.72,687.18 1202.12,687.18 ccw(c1202.12,787.18) 1272.83,716.47 1381.22,824.86 v1(1381.22,826.03)
TCK3: P2.7 RN1.1 U1.24 | length 1088.7
  Top Layer w8: U1.24 1234.63,990.16 ccw(c1234.63,1019.07) 1255.07,998.62 1271.92,1015.47 v1(1273.09,1015.47)
  Top Layer w10: RN1.1 1211.43,1831.73 cw(c1237.15,1831.73) 1218.96,1849.92 1230.73,1861.69 ccw(c1219.82,1872.6) 1235.25,1872.6 P2.7
  Bottom Layer w8: P2.7@1246.46,1897.87 1246.46,1028.36 ccw(c1259.22,1028.36) 1259.22,1015.6 1273.09,1015.6 v1(1273.09,1015.47)
TDI3: P2.3 RN1.3 U1.22 | length 1180.4
  Top Layer w8: U1.22 1268.02,950.79 v1(1273.09,955.85)
  Top Layer w10: P2.3 1135.26,1866.63 ccw(c1147.63,1866.63) 1138.88,1857.88 cw(c1125.3,1844.3) 1144.51,1844.3 RN1.3
  Bottom Layer w8: P2.3 1135.25,1836.39 ccw(c1235.25,1836.39) 1164.54,1765.68 1201.49,1728.73 cw(c1170.18,1697.41) 1214.46,1697.41 1214.46,1000.73 ccw(c1259.22,1000.73) 1259.22,955.98 1273.09,955.98 v1(1273.09,955.85)
TDO3: P2.1 RN1.4 U1.21 | length 1240
  Top Layer w8: U1.21 1268.02,931.1 v1(1273.09,926.04)
  Top Layer w10: P2.1 1085.25,1872.6 ccw(c1100.69,1872.6) 1089.77,1861.69 1101.54,1849.92 cw(c1083.35,1831.73) 1109.07,1831.73 RN1.4
  Bottom Layer w8: P2.1 1085.25,1862.23 ccw(c1185.85,1862.23) 1114.72,1791.1 1192.11,1713.71 cw(c1176.76,1698.36) 1198.46,1698.36 1198.46,986.92 ccw(c1259.22,986.92) 1259.22,926.17 1273.09,926.17 v1(1273.09,926.04)
TEST: P2.8 U1.19 | length 1487.7
  Top Layer w8: U1.19 1234.63,891.73 cw(c1234.63,862.82) 1255.07,883.26 v1@1271.92,866.41 ; v1@1271.92,866.41 v1(1273.09,866.41) v1@1271.92,866.41
  Bottom Layer w8: P2.8 1235.25,1970.6 cw(c1244.52,1970.6) 1244.52,1979.87 1397.72,1979.87 cw(c1397.72,1960.34) 1417.25,1960.34 1417.25,1863.79 cw(c1330.98,1863.79) 1391.98,1802.79 1326.07,1736.88 ccw(c1396.78,1666.17) 1296.78,1666.17 1296.78,1522.63 ccw(c1331.8,1522.63) 1307.04,1497.87 cw(c1284.42,1475.25) 1316.41,1475.25 1316.41,881.53 cw(c1301.3,881.53) 1301.3,866.41 v1(1273.09,866.41)
TMS3: P2.5 RN1.2 U1.23 | length 1130.1
  Top Layer w8: U1.23 1247.92,970.47 ccw(c1247.92,994.55) 1264.95,977.52 v1(1273.09,985.66)
  Top Layer w10: RN1.2 1176,1844.3 cw(c1195.21,1844.3) 1181.63,1857.88 ccw(c1172.88,1866.63) 1185.25,1866.63 P2.5
  Bottom Layer w8: P2.5 1185.25,1807.27 ccw(c1263.14,1807.27) 1208.06,1752.19 cw(c1153.99,1698.12) 1230.46,1698.12 1230.46,1014.54 ccw(c1259.22,1014.54) 1259.22,985.79 1273.09,985.79 v1(1273.09,985.66)
VC: L1.2 P1.2 | length 1445.3
  Top Layer w20: v1(575.51,1403.66) L1.2
  Bottom Layer w20: v1(575.51,1403.66) 508.67,1403.66 ccw(c508.67,1375) 480,1375 480,820.36 ccw(c565.36,820.36) 505,760 cw(c468.79,723.79) 520,723.79 520,585 ccw(c615,585) 615,490 875,490 ccw(c875,515) 900,515 P1.2
VDDA3: C6.2 C7.2 R3.1 U1.52 | length 406.9
  Top Layer w8: R3.1 C6.2 C7.2 723.52,1238.31 cw(c723.52,1216.71) 745.12,1216.71 745.12,1102.2 ccw(c758.74,1102.2) 758.74,1088.58 U1.52
VDDD3: C1.2 C2.2 C3.2 C4.2 C5.2 C9.2 P2.4 R1.2 R2.2 R4.2 R5.2 R6.2 R9.1 RN1.5 RN1.6 RN1.7 RN1.8 U1.18 U1.35 U1.48 U1.63 U2.1 U3.1 | length 5715.8
  Top Layer w8: v1(590.66,1027.64) U2.1 ; C4.2@690.22,872.05 U1.63 ; U1.48 852.36,1232.46 cw(c873.31,1232.46) 858.5,1247.27 882.42,1271.2 ccw(c866.15,1287.47) 889.16,1287.47 C5.2 867.55,1320.99 cw(c867.55,1335.79) 852.75,1335.79 852.75,1403.66 ; 990.35,1362.39 990.35,1383.91 cw(c1010.1,1383.91) 1010.1,1403.66 R1.2 ; R4.2 1030.9,577.68 ccw(c1033.08,577.68) 1033.08,575.5 ; U1.35 1108.27,1246.8 ccw(c1065.57,1246.8) 1095.76,1276.99 cw(c1109.78,1291.02) 1089.95,1291.02 C2.2 1110.75,1320.99 ccw(c1110.75,1340.74) 1130.5,1340.74 1130.5,1362.26 ; R5.2 1113.58,575.5 1114.27,575.5 ; U1.18 1233.97,872.05 cw(c1233.97,863.09) 1242.93,863.09 1242.93,824.62 cw(c1212.77,824.62) 1234.09,803.29 1205.54,774.74 ccw(c1227.95,752.33) 1196.26,752.33 C3.2 1263.83,688.7 ; 1227.21,1362.39 ccw(c1225.83,1363.77) 1227.78,1363.77 ; 1265.18,687.35 ccw(c1263.83,687.35) 1263.83,688.7 ; 1311.58,688.7 1263.83,688.7
  Top Layer w10: v1(517.45,1027.64) 517.45,954.28 ccw(c546.05,954.28) 546.05,925.68 668.15,925.68 cw(c668.15,905.46) 688.38,905.46 C4.2 ; 570.73,662.9 570.73,663.27 666.74,663.27 ccw(c666.74,677.03) 680.5,677.03 R6.2 ; v1(762.68,1680.24) U3.1@762.68,1710.55 ; v1(852.97,1596.76) 1017.62,1596.76 ccw(c1017.62,1641.05) 1061.9,1641.05 1061.9,1699.22 ; v1(1036.24,1931.91) 1036.24,1781.21 cw(c1026.68,1781.21) 1026.68,1771.65 1017.05,1771.65 ccw(c1017.05,1752.38) 997.78,1752.38 997.78,1716.17 ccw(c1014.74,1716.17) 1014.74,1699.22 1061.9,1699.22 ; RN1.5 1109.07,1699.22 ; RN1.6 1144.51,1699.22 ; RN1.7 1176,1699.22 ; RN1.8 1211.44,1699.22 ; R9.1 1366.95,1719.67 cw(c1346.49,1719.67) 1346.49,1699.22 1211.44,1699.22 ; 1061.9,1699.22 1109.07,1699.22 ; 1109.07,1699.22 1144.51,1699.22 ; 1144.51,1699.22 1176,1699.22 ; 1176,1699.22 1211.44,1699.22
  Top Layer w15: 570.73,662.9 570.73,610.96 ccw(c606.2,610.96) 606.2,575.5 1033.08,575.5 1113.58,575.5 ; 570.73,663.27 570.73,920.68 ; v1(797.09,1520.92) 823.46,1494.56 cw(c752.75,1423.84) 852.75,1423.84 852.75,1403.66 ; R2.2 852.75,1403.66 ; 857.75,1362.39 990.35,1362.39 1227.21,1362.39 1255.29,1362.39 cw(c1255.29,1304.99) 1312.69,1304.99 1312.69,620.59 cw(c1267.6,620.59) 1267.6,575.5 1114.27,575.5 ; C1.2 852.75,1403.66
  Bottom Layer w8: v1(517.45,1027.64) v1(590.66,1027.64) ; v1(1036.24,1931.91) 1036.24,1960.64 cw(c1055.47,1960.64) 1055.47,1979.87 1125.98,1979.87 cw(c1125.98,1970.6) 1135.25,1970.6 P2.4
  Bottom Layer w10: v1(762.68,1680.24) 762.68,1596.76 ; v1(797.09,1520.92) 791.97,1526.05 cw(c862.68,1596.76) 762.68,1596.76 ; v1(852.97,1596.76) 762.68,1596.76
pads on no net: P2.2 P2.6 P2.10 P2.12 P2.13 P2.14 U1.2 U1.3 U1.4 U1.5 U1.6 U1.7 U1.8 U1.9 U1.10 U1.11 U1.12 U1.13 U1.14 U1.25 U1.26 U1.27 U1.28 U1.29 U1.30 U1.31 U1.32 U1.36 U1.37 U1.38 U1.39 U1.40 U1.41 U1.42 U1.43 U1.44 U1.45 U1.46 U1.47 U1.50 U1.51 U1.54 U1.58 U1.60 U1.61 U3.2
copper on no net: | length 67.4
  Top Layer w10: v1(652.95,1536.98) v1@654.25,1535.68
  Bottom Layer w10: v1(613.72,1586.89) ccw(c614.83,1585.78) 613.26,1585.78 ccw(c635.25,1585.78) 619.7,1570.23 v1(652.95,1536.98)

## Polygon pours and split planes (outlines as drawn)
GNDC on Bottom Layer "Bottom Layer-GNDC" (solid, remove dead copper, pour order 0): 386.35,2096.71 386.35,371.71 1566.35,371.71 1566.35,2096.71

## Keep-outs
Keep-Out Layer:
  the board outline again, w10

## Other copper
Bottom Layer:
  pour cut-out: 1000,513.69 1100,513.69 1100,538.56 ccw(c1083.66,538.56) 1083.66,554.9
  pour cut-out: 579.91,799.01 517.66,799.01 cw(c517.66,820.36) 496.31,820.36 496.31,797.25 cw(c468.56,797.25) 468.56,769.49
  pour cut-out: 1300.76,1881.56 cw(c1299.86,1881.56) 1299.86,1880.67 1274.15,1880.67 ccw(c1274.15,1877.09) 1270.57,1877.09 1270.57,1844.44 1281.08,1844.44

## Silkscreen, mask and mechanical layers (free items; w line width, h text height)
Top Overlay:
  drawing of 1868 lines, arcs and shapes, not listed
  text "MSP430 TEST BOARD" at 1003.56,1654.04 h50
  text "05/14/2018 V1.0 REV 212" at 1003.32,1614.47 h40
  text "S. Damkjar" at 1002.23,1575.63 h40
Bottom Overlay:
  rectangle: 625,875 1375,1375
  text "3V3" at 819.47,618.04 h60 r90
  text "VDUT" at 919.47,618.04 h60 r90
  text "TXS" at 1019.47,618.04 h60 r90
  text "RXS" at 1119.47,618.04 h60 r90
  text "GND" at 1219.47,618.04 h60 r90